# Altium PCB PCB1.PcbDoc (part 3 of 3)
Units mil, origin at the board's own origin, x right, y up, seen from the top; angles counter-clockwise.
Board outline 3937.01 x 3937.01 mil, 4 copper layers (L1, L2, L3, L4), stack 61.831 mil thick; 104 components, 183 nets, 709 pads, 345 vias.
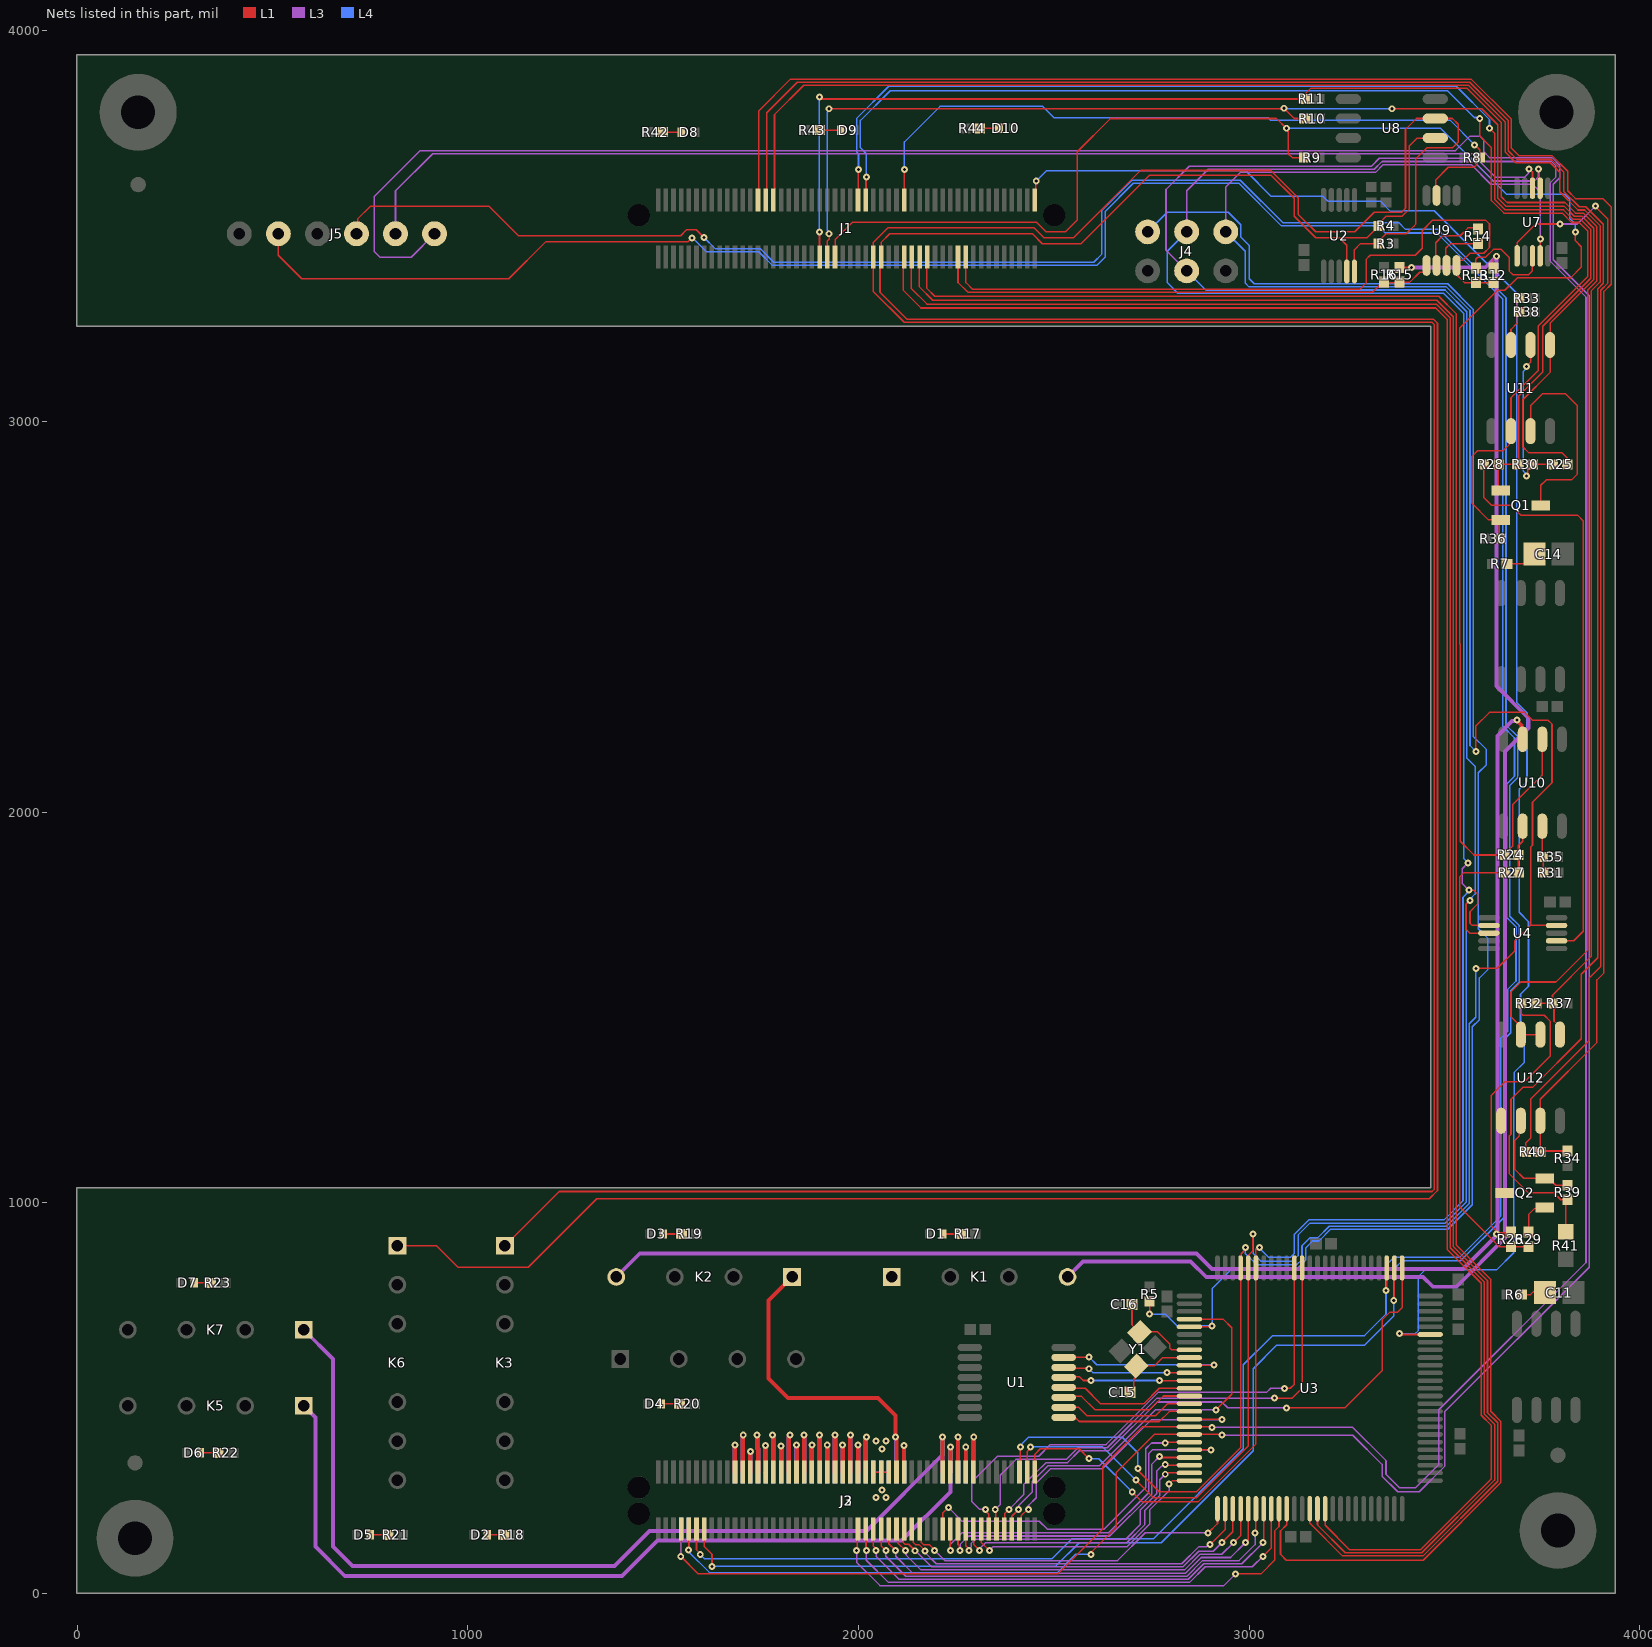
[diagram p5: the nets of this part, all layers, seen from the top]

## Via types
v1: diameter 17.72, hole 7.87, L1 to L4, 345 vias

## Nets (pads, with @x,y where several pads share a name; then routed paths per layer and width w, separated by ;. In a path a pad name is that pad's centre, name@x,y a point inside that pad or via, vN(x,y) a via of type N, cw(c..) or ccw(c..) an arc to the next point about the centre after c; other vN are vias at no path point) (continued)
GPIO43: J1.99 U3.95 | length 4467.8
  L1 w4: J1.99@2451.54,3566.42 2453.27,3568.15 2453.27,3613.27 v1(2455,3615) ; v1(3385,665) 3390,665 3392.2,662.8 U3.95@3463.07,662.8
  L4 w4: v1(2455,3615) 2481,3641 2990.81,3641 3055.96,3575.86 3188.89,3575.86 3201.75,3563 3335.69,3563 3361.69,3537 3391.57,3537 3393.36,3538.79 3473.58,3538.79 3684.84,3327.53 3684.84,2280.16 3711,2254 3711,2078.2 3691,2058.2 3691,1743.24 3714.86,1719.38 3714.86,1554.04 3694.28,1533.46 3694.28,1437.03 3704,1427.31 3704,1359 3678,1333 3678,1272.25 3677.14,1271.39 3677.14,872.14 3633,828 3450,828 3433,811 3433,673 3425,665 v1(3385,665)
GPIO44: J1.66 U3.65 | length 5092.2
  L1 w4: J1.66@2116.89,3420.75 2115,3418.86 2115,3335 2160,3290 3477.37,3290 3506.35,3261.03 3506.35,881.17 3593.86,793.66 3593.86,456.14 3620,430 3620,293.69 3438.31,112 3256.69,112 3194.37,174.32 U3.65@3194.37,216.93
GPIO45: J1.68 U3.64 | length 5114.1
  L1 w4: J1.68@2135,3420.75 2135,3340 2175,3300 3478.69,3300 3514.35,3264.34 3514.35,884.48 3601.86,796.97 3601.86,459.46 3628,433.31 3628,290.37 3441.63,104 3246,104 3174.69,175.31 U3.64@3174.69,216.93
GPIO46: J1.70 U3.63 | length 5134.7
  L1 w4: J1.70@2155,3420.75 2155,3345 2190,3310 3480,3310 3522.35,3267.65 3522.35,887.8 3609.86,800.28 3609.86,462.77 3636,436.63 3636,287.06 3444.94,96 3239,96 3155,180 U3.63@3155,216.93
GPIO47: J1.72 U3.60 | length 5277.2
  L1 w4: J1.72@2175,3420.75 2175,3340 2195,3320 3485,3320 3530.35,3274.65 3530.35,891.11 3617.86,803.6 3617.86,466.08 3644,439.94 3644,283.75 3445.25,85 3095,85 3080,100 3080,160 3095.94,175.94 U3.60@3095.94,216.93
GPIO48: J2.54 U3.59 | length 1344.7
  L1 w4: v1(1995,110) 1996.89,111.89 1996.89,162.95 J2.54@1998.78,164.84 ; v1(2965,50) 3030,50 3065,85 3065,160 3076.26,171.26 U3.59@3076.26,216.93
  L3 w4: v1(1995,110) 1995,80 2054.86,20.14 2935.14,20.14 v1(2965,50)
GPIO49: J2.56 U3.58 | length 1277.6
  L1 w4: J2.56@2018.46,164.84 2019.23,164.07 2019.23,110.77 v1(2020,110) ; v1(3035,95) 3056.57,116.57 U3.58@3056.57,216.93
  L3 w4: v1(2020,110) 2020,85 2076.86,28.14 2847.34,28.14 2887.2,68 3008,68 v1(3035,95)
GPIO50: J2.58 U3.57 | length 1213.6
  L1 w4: J2.58@2038.15,164.84 2038.15,120.56 2045,113.71 v1(2045,110) ; v1(3035,130) 3036.89,131.89 U3.57@3036.89,216.93
  L3 w4: v1(2045,110) 2045,95 2103.86,36.14 2844.02,36.14 2883.88,76 2981,76 v1(3035,130)
GPIO51: J2.60 U3.56 | length 1167.3
  L1 w4: J2.60@2057.83,164.84 2057.83,122.17 v1(2070,110) ; v1(3015,155) 3017.2,157.2 U3.56@3017.2,216.93
  L3 w4: v1(2070,110) 2070,95 2120.86,44.14 2840.71,44.14 2880.57,84 2974,84 3015,125 v1(3015,155)
GPIO52: J2.62 U3.55 | length 1112.1
  L1 w4: J2.62@2077.52,164.84 2077.52,127.48 v1(2095,110) ; v1(2990,130) 2997.52,137.52 U3.55@2997.52,216.93
  L3 w4: v1(2095,110) 2095,95 2137.86,52.14 2837.4,52.14 2877.25,92 2952,92 v1(2990,130)
GPIO53: J2.64 U3.54 | length 1054
  L1 w4: J2.64@2097.2,164.84 2100,162.05 2100,130 v1(2120,110) ; v1(2960,130) 2977.83,147.83 U3.54@2977.83,216.93
  L3 w4: v1(2120,110) 2121.51,108.49 2121.51,98.49 2159.86,60.14 2834.08,60.14 2873.94,100 2930,100 v1(2960,130)
GPIO54: J2.66 U3.53 | length 1030.5
  L1 w4: J2.66@2120.8,137.31 2116.89,141.22 J2.66@2116.89,164.84 2115,162.95 2115,130 2119.14,125.86 2128.26,125.86 v1(2144.95,109.17) v1@2144.95,110.05 ; v1(2930,130) 2958.15,158.15 U3.53@2958.15,216.93
  L3 w4: v1(2144.95,109.17) 2145.83,109.17 2186.86,68.14 2830.77,68.14 2870.63,108 2908,108 v1(2930,130)
GPIO55: J2.68 U3.52 | length 949.1
  L1 w4: J2.68@2136.57,164.84 2140.48,160.94 2140.48,130.38 2145.86,125 2155,125 2170,110 v1(2170,109.14) ; v1(2900,125) 2938.46,163.46 U3.52@2938.46,216.93
  L3 w4: v1(2170,109.14) 2170,105 2198.86,76.14 2827.46,76.14 2871.31,120 2891.29,120 2896.29,125 v1(2900,125)
GPIO56: J2.70 U3.51 | length 891.3
  L1 w4: J2.70@2156.26,164.84 2160.17,160.94 2160.17,131.15 2166.31,125 2181.01,125 2195,111.01 v1(2195,110) ; v1(2895,155) 2918.78,178.78 U3.51@2918.78,216.93
  L3 w4: v1(2195,110) 2220.86,84.14 2663.08,84.14 2733.94,155 v1(2895,155)
GPIO57: J2.76 U3.45 | length 852
  L1 w4: J2.76@2215.32,164.84 2215.16,165 2215.16,205.16 v1(2230,220) ; v1(2785,385) 2787.2,387.2 U3.45@2846.93,387.2
  L3 w4: v1(2230,220) 2265,185 2462.85,185 2484.02,163.83 2627.62,163.83 2735,271.2 2735,370 2750,385 v1(2785,385)
GPIO58: J2.78 U3.46 | length 952
  L1 w4: v1(2235,110) J2.78@2235,164.84 ; U3.46@2846.93,367.52 v1(2902.52,367.52)
  L3 w4: v1(2235,110) 2235,125 2265,155 2640,155 2743,258 2743,358 2752.52,367.52 v1(2902.52,367.52)
GPIO59: J2.80 U3.47 | length 797.8
  L1 w4: J2.80@2254.69,164.84 2254.69,125.31 2257.38,122.62 2257.38,112.62 v1(2260,110) ; v1(2770,350) 2772.17,347.83 U3.47@2846.93,347.83
  L3 w4: v1(2260,110) 2260,125 2282,147 2643.31,147 2751,254.69 2751,331 v1(2770,350)
GPIO60: J2.82 U3.48 | length 777.5
  L1 w4: J2.82@2274.37,164.84 2274.37,122.06 2282.72,113.71 v1(2282.72,110) ; v1(2785,330) 2786.85,328.15 U3.48@2846.93,328.15
  L3 w4: v1(2282.72,110) 2282.72,112.92 2289,119.2 2289,129 2299,139 2684,139 2721.31,176.31 2721.31,213.69 2762.83,255.2 2762.83,312.83 2775.99,325.99 2777.28,325.99 2781.29,330 v1(2785,330)
GPIO61: J2.84 U3.49 | length 728.2
  L1 w4: J2.84@2294.06,164.84 2295,163.9 2295,125 v1(2310,110) ; v1(2785,305) 2788.46,308.46 U3.49@2846.93,308.46
  L3 w4: v1(2310,110) 2310,113.71 2314.01,117.72 2314.01,119.01 2325,130 2686.31,130 2733.03,176.72 2733.03,213.03 2770.83,250.83 2770.83,290.83 v1(2785,305)
GPIO62: J2.86 U3.50 | length 687.1
  L1 w4: J2.86@2313.74,164.84 2313.74,131.26 v1(2335,110) ; v1(2795,280.13) 2795.13,280.13 2803.78,288.78 U3.50@2846.93,288.78
  L3 w4: v1(2335,110) 2345,120 2687.63,120 2745,177.37 2745,213.69 2795,263.69 v1(2795,280.13) 2795,280.86 v1@2799.14,285
GPIO63: J2.88 U3.15 | length 1373.8
  L1 w4: v1(2325,215) 2325,211.29 2333.43,202.86 J2.88@2333.43,164.84 ; v1(3090,525) 3105,525 3115.63,535.63 U3.15@3115.63,833.07
  L3 w4: v1(2325,215) 2310,215 2290,235 2290,285 2356,351 2461,351 2491,381 2633.37,381 2767.7,515.33 3045.33,515.33 3055,525 v1(3090,525)
GPIO64: J2.90 U3.14 | length 1317
  L1 w4: v1(2350,215) 2351.56,213.44 2351.56,166.4 J2.90@2353.11,164.84 ; v1(3065,500) 3110,500 3135.32,525.31 U3.14@3135.32,833.07
  L3 w4: v1(2350,215) 2362.67,227.67 2362.67,302.67 2403,343 2531.69,343 2561.69,373 2636.69,373 2763.69,500 v1(3065,500)
GPIO65: J2.92 U3.1 | length 1480.6
  L1 w4: J2.92@2372.8,164.84 2373.9,165.94 2373.9,203.9 v1(2385,215) ; v1(3095,475) 3245,475 3340,570 3340,700 3360,720 3380,720 3391.22,731.22 U3.1@3391.22,833.07
  L3 w4: v1(2385,215) 2422.5,252.5 2422.5,278.71 2480.44,335 2535,335 2565,365 2640,365 2765,490 2930,490 2945,475 v1(3095,475)
GPIO66: J2.94 U3.29 | length 1033.6
  L1 w4: J2.94@2392.48,164.84 2392.48,197.48 v1(2410,215) ; U3.29@2846.93,702.17 2932.83,702.17 2955,680 2955,510 v1(2915,470)
  L3 w4: v1(2410,215) 2410,225 2445,260 2445,287.11 2484.89,327 2617,327 2760,470 v1(2915,470)
GPIO67: J2.96 U3.42 | length 762.8
  L1 w4: J2.96@2412.17,164.84 2416.07,168.75 2416.07,198.64 2432.43,215 v1(2435,215) ; U3.42@2846.93,446.26 2928.74,446.26 v1(2930,445)
  L3 w4: v1(2435,215) 2435,225 2455,245 2455,282.51 2491.49,319 2624,319 2750,445 v1(2930,445)
H: J2.21 J3.22 | length 139
  L1 w11.55: v1(1683.77,380) 1683.82,379.95 J2.21@1683.82,310.51
  L4 w11.55: J3.22@1683.82,310.51 v1(1683.77,380)
I: J2.23 J3.24 | length 190.2
  L1 w11.55: J2.23@1703.5,310.51 1703.5,403.5 v1(1705,405)
  L4 w11.55: J3.24@1703.5,310.51 1703.5,401.84 1705,403.33 v1(1705,405)
J: J2.25 J3.26 | length 105.3
  L1 w11.55: J2.25@1723.19,310.51 v1@1723.16,363.13
  L4 w11.55: J3.26@1723.19,310.51 v1@1723.16,363.13
  other v1: 1723.14,363.16
K: J2.27 J3.28 | length 191.4
  L1 w11.55: v1(1740,405) 1740.73,404.27 1740.73,371.87 1742.87,369.73 J2.27@1742.87,310.51
  L4 w11.55: v1(1740,405) 1740.73,404.27 1740.73,371.87 1742.87,369.73 J3.28@1742.87,310.51
L: J2.29 J3.30 | length 137.7
  L1 w11.55: v1(1761.45,378.92) 1761.45,311.62 J2.29@1762.56,310.51
  L4 w11.55: v1(1761.45,378.92) 1761.45,311.62 J3.30@1762.56,310.51
M: J2.31 J3.32 | length 190.8
  L1 w11.55: v1(1780,405) 1782.24,402.76 J2.31@1782.24,310.51
  L4 w11.55: v1(1780,405) 1780,403.33 1782.24,401.09 J3.32@1782.24,310.51
MISO: J2.95 J4.1 U3.22 U4.9 U7.9 | length 6696.8
  L1 w4: J2.95@2412.17,310.51 2413.58,311.93 2413.58,373.58 v1(2415,375) ; v1(2715,320) 2715,315 2770,260 2865,260 2977.83,372.83 U3.22@2977.83,833.07 2979.33,834.57 2979.33,869.33 2990,880 v1(2990,885) ; v1(3580,1600) 3635,1600 3680,1645 3680,1670 3720,1710 ; v1(3580,2155) 3580,2220 3615,2255 3705,2255 3725,2235 3765,2235 3775,2225 3775,2075 3725,2025 3725,1915 3720,1910 3720,1710 ; U7.9@3744.69,3419.45 3744.69,3464.69 3745,3465 v1(3745,3466.14) ; U4.9@3790.55,1709.69 3790.24,1710 3720,1710
  L3 w4: J4.1@2940,3485 2940,3600 2977,3637 3323.31,3637 3343.31,3657 3568,3657 3618,3607 3725,3607 3745,3587 v1(3745,3466.14)
  L4 w4: v1(2415,375) 2415,378.71 2419.01,382.72 2419.01,384.01 2435,400 2675,400 2715,360 v1(2715,320) ; J4.1@2950,3475 2990,3435 2990,3353.69 2999.69,3344 3504.69,3344 3565,3283.69 3565,2170 v1(3580,2155) ; v1(2990,885) 2990,870 3018.34,841.66 3121.66,841.66 3135,855 3135,890 3155,910 3175,910 3205,940 3505,940 3563.14,998.14 3563.14,1458.14 3580,1475 v1(3580,1600)
MOSI: J2.97 J4.4 U3.21 U4.3 U7.3 | length 6440.6
  L1 w4: J2.97@2431.85,310.51 2431.85,363.14 2440,371.29 v1(2440,375) ; v1(2710,290) 2755,245 2865,245 2997.52,377.52 U3.21@2997.52,833.07 2997.52,865.09 3009.14,876.71 3009.14,919.14 v1(3010,920) ; v1(3565,1773.99) 3555,1763.99 3555,1700 3565,1690 U4.3@3609.45,1690 ; v1(3715.57,3646.14) 3716.91,3646.14 3725,3638.05 U7.3@3725,3600.55
  L3 w4: J4.4@2830,3390 2830,3395 2787,3438 2787,3593.31 2846.69,3653 3313,3653 3333,3673 3582,3673 3630,3625 3705,3625 3714.28,3634.28 3714.28,3644.85 v1(3715.57,3646.14)
  L4 w4: v1(2440,375) 2625,375 v1(2710,290) ; J4.4@2840,3385 2889,3336 3501.37,3336 3557,3280.37 3557,2166.69 3557,2138.36 3578,2117.36 3578,1790 3565,1777 v1(3565,1773.99) 3565,1773.66 3555.14,1763.8 3555.14,1001.46 3501.69,948 3155.57,948 3125,917.43 3125,865 3110,850 3030,850 3010,870 v1(3010,920)
N: J2.33 J3.34 | length 132.9
  L1 w11.55: J2.33@1801.93,310.51 v1(1801.88,376.93)
  L4 w11.55: J3.34@1801.93,310.51 v1(1801.88,376.93)
NET1: J1.31 R32.1 R37.2 U12.5 | length 4757.2
  L1 w4: J1.31@1785,3566.42 1785,3785 1860,3860 3561.31,3860 3655,3766.31 3655,3689.34 3682.34,3662 3770.37,3662 3795,3637.37 3795,3587.37 3841.51,3540.86 3858.14,3540.86 3898,3501 3898,3356.43 3875,3333.43 3875,3155 3875,1630 3776.3,1531.3 R37.2@3776.3,1510 ; R32.1@3733.7,1510 R37.2@3776.3,1510 ; U12.5@3795,1430.24 3795,1450 3780,1465 3780,1506.3 R37.2@3776.3,1510
NET2: J1.55 Q1.2 R36.2 U11.6 | length 3357.3
  L1 w4: J1.55@2018.46,3566.42 2019.23,3567.19 2019.23,3624.23 v1(2020,3625) ; v1@3590,3774.95 3590,3730 3620,3700 3620,3565 3652,3533 3801,3533 3825.14,3508.86 3844.88,3508.86 3866,3487.74 3866,3369.69 3740,3243.69 3740,3130 3670,3060 U11.6@3670,2974.76 3665.87,2970.63 3665.87,2940.87 3657.93,2932.93 3650,2925 3585,2925 3570,2910 3570,2790 3612.4,2747.6 Q1.2@3643.82,2747.6 3640,2743.78 3640,2703.7 R36.2@3643.7,2700
  L4 w4: v1(2020,3625) 2020,3685 2005,3700 2005,3770 2081,3846 3507.29,3846 3575.66,3777.62 3587.38,3777.62 3587.38,3777.57 v1(3589.97,3774.97)
NET3: J1.53 Q1.1 R28.1 R30.1 | length 3186.9
  L1 w4: J1.53@1998.78,3566.42 1999.39,3567.03 1999.39,3644.39 v1(2000,3645) ; v1(3615,3750) 3628,3737 3628,3568.31 3655.31,3541 3804.31,3541 3828.46,3516.86 3848.2,3516.86 3874,3491.05 3874,3366.37 3751.2,3243.58 3751.2,3126.2 3690,3065 3690,2892.4 R30.1@3687.6,2890 R28.1@3637.4,2890 3637.4,2828.82 Q1.1@3643.82,2822.4
  L4 w4: v1(2000,3645) 2000,3685 1995,3690 1995,3775 2077.71,3857.71 3529.67,3857.71 3615,3772.37 v1(3615,3750)
NET4: J1.29 R39.1 R41.2 | length 5427.4
  L1 w4: J1.29@1765,3566.42 1765,3790 1843,3868 3564.63,3868 3663,3769.63 3663,3692.66 3685.66,3670 3773.69,3670 3805.28,3638.4 3805.28,3588.4 3844.83,3548.86 3861.45,3548.86 3906,3504.31 3906,3353.12 3891.8,3338.92 3891.8,1626.8 3850,1585 3850,1420 3725,1295 3700,1295 3670,1265 3670,1175 3665,1170 3665,1075 3715,1025 3780,1025 3797.4,1007.6 R39.1@3815,1007.6 3810,1002.6 R41.2@3810,925.87
NET5: J1.27 R34.1 R40.2 U12.3 | length 5216.7
  L1 w4: J1.27@1745,3566.42 1745,3795 1826,3876 3567.94,3876 3671,3772.94 3671,3699 3690,3680 3775,3680 3815,3640 3815,3590 3835,3570 3905,3570 3926.6,3548.4 3926.6,3351.09 3907.8,3332.29 3907.8,1587.8 3890,1570 3890,1410 3745,1265 U12.3@3745,1209.76 R40.2@3745,1130 3747.4,1132.4 R34.1@3815,1132.4
NET6: J1.82 R12.1 R13.2 U9.4 | length 1832.8
  L1 w4: J1.82@2274.37,3420.75 2275,3420.12 2275,3355 2292,3338 3283.31,3338 3299.14,3353.83 3299.14,3414.14 3310,3425 3425,3425 3443,3443 3443,3488 3470,3515 3605,3515 3615,3505 3615,3445 3600,3430 3565,3430 3547.68,3412.69 3538.75,3412.69 3530.59,3404.53 U9.4@3530.59,3395 ; U9.4@3528.39,3381.5 3528.39,3377.52 3550.91,3355 R13.2@3580,3355 R12.1@3625,3355
NET7: J1.80 R15.1 R16.2 U9.1 | length 1294.8
  L1 w4: J1.80@2254.69,3420.75 2254.69,3355.31 2280,3330 3315,3330 3328.22,3343.22 3329.2,3343.22 3340,3354.02 3340,3355 3383.7,3355 R15.1@3385,3356.3 3411.3,3356.3 3436.5,3381.5 U9.1@3451.61,3381.5
NetC11_2: C11.2 R6.1 | length 39.8
  L1 w4: R6.1@3694.35,765 3720,765 C11.2@3730,775
NetC14_2: C14.2 R7.1 | length 80.4
  L1 w4: R7.1@3660,2635 3705,2635 C14.2@3730,2660
NetC15_2: C15.2 U3.34 Y1.1 | length 218.6
  L1 w4: C15.2@2695,515 2705,525 2705,549.49 2710.82,555.32 Y1.1@2710.82,581.85 2712.22,583.24 2758.24,583.24 2778.74,603.74 U3.34@2846.93,603.74
NetC16_2: C16.2 U3.33 Y1.3 | length 233.5
  L1 w4: C16.2@2700,740 2700,687.33 Y1.3@2719.18,668.15 2720.57,669.54 2756.45,669.54 2756.91,670 2765,670 2796.17,638.83 2796.17,628.83 2800.01,624.99 2801.57,623.43 U3.33@2846.93,623.43
NetD1_2: D1.2 R17.2 | length 45.9
  L1 w4: D1.2@2215.43,920 R17.2@2261.3,920
NetD2_2: D2.2 R18.2 | length 42.6
  L1 w4: D2.2@1050,150 R18.2@1092.6,150
NetD3_2: D3.2 R19.2 | length 47.2
  L1 w4: D3.2@1500.43,920 R19.2@1547.6,920
NetD4_2: D4.2 R20.2 | length 47.6
  L1 w4: D4.2@1495,485 R20.2@1542.6,485
NetD5_2: D5.2 R21.2 | length 46.3
  L1 w4: D5.2@750,150 R21.2@796.3,150
NetD6_2: D6.2 R22.2 | length 46.3
  L1 w4: D6.2@315,360 R22.2@361.3,360
NetD7_2: D7.2 R23.2 | length 41.3
  L1 w4: D7.2@300,795 R23.2@341.3,795
NetD8_2: D8.2 R42.2 | length 48.5
  L1 w4: R42.2@1498.7,3740 D8.2@1547.18,3740
NetD9_2: D9.2 R43.2 | length 54.6
  L1 w4: R43.2@1900,3745 D9.2@1954.57,3745
NetD10_2: D10.2 R44.2 | length 49.6
  L1 w4: R44.2@2310,3750 D10.2@2359.57,3750
NetQ1_3: Q1.3 U11.7 | length 542
  L1 w4: U11.7@3720,2974.76 3720,3040 3750,3070 3810,3070 3840,3040 3840,2865 3825,2850 3760,2850 3746.18,2836.18 Q1.3@3746.18,2785
NetQ2_1: Q2.1 R29.1 | length 93.5
  L1 w4: R29.1@3715,925 3715,970 3730,985 3753.58,985 Q2.1@3756.18,987.6
NetQ2_2: Q2.2 R39.2 U12.2 | length 282.5
  L1 w4: U12.2@3695,1209.76 3690.87,1205.63 3690.87,1170.87 3680,1160 3680,1085 3702.6,1062.4 Q2.2@3756.18,1062.4 3767.01,1062.4 3784.41,1045 R39.2@3815,1045
NetQ2_3: Q2.3 U12.1 | length 188.4
  L1 w4: U12.1@3645,1209.76 3645,1033.82 Q2.3@3653.82,1025
NetR14_1: R14.1 U9.2 | length 200.2
  L1 w4: U9.2@3477.2,3381.5 3477.2,3457.2 3495,3475 3540,3475 3560,3495 3582.4,3495 R14.1@3585,3492.4
NetR14_2: R14.2 U9.3 | length 148.6
  L1 w4: U9.3@3502.8,3381.5 3502.8,3442.8 3515,3455 R14.2@3585,3455
NetR24_1: R24.1 R27.2 U10.2 | length 126.6
  L1 w4: R27.2@3687.4,1842.4 3688.7,1843.7 R24.1@3688.7,1890 3688.7,1913.7 3700,1925 U10.2@3700,1963.78
NetR25_1: R25.1 R30.2 U11.2 | length 434.8
  L1 w4: v1(3710,2860) 3713.22,2863.22 3713.22,2879.2 3724.02,2890 R30.2@3725,2890 R25.1@3776.3,2890 ; v1(3710,3140) 3710,3141.01 3720,3151.01 U11.2@3720,3195.24
  L4 w4: v1(3710,2860) 3710,2863.71 3701.14,2872.57 3701.14,3127.43 3710,3136.29 v1(3710,3140)
NetR26_1: R26.1 R27.1 R29.2 | length 1181.6
  L1 w4: R27.1@3652.6,1845 3550,1845 3538.35,1833.35 3538.35,989.85 3640.6,887.6 R26.1@3670,887.6 R29.2@3715,887.6
NetR31_2: R31.2 R35.2 U10.3 | length 119.9
  L1 w4: U10.3@3750,1963.78 3750,1891.3 3751.3,1890 3752.6,1888.7 R31.2@3752.6,1845
NetR33_2: R33.2 R38.2 U11.3 | length 116.5
  L1 w4: U11.3@3670,3195.24 3670,3235 3686.3,3251.3 R33.2@3686.3,3305
O: J2.35 J3.36 | length 192
  L1 w11.55: J2.35@1821.61,310.51 1821.51,310.62 1821.51,401.51 v1(1825,405)
  L4 w11.55: J3.36@1821.61,310.51 1821.51,310.62 1821.51,399.84 1825,403.33 v1(1825,405)
P: J2.37 J3.38 | length 130.3
  L1 w11.55: J2.37@1841.3,310.51 v1@1841.3,371.3
  L4 w11.55: v1(1841.14,380) 1841.22,379.92 1841.22,310.59 J3.38@1841.3,310.51
P0W: R28.2 U4.7 | length 1489.5
  L1 w4: R28.2@3600,2890 3600,2805 3620,2785 3670,2785 3695,2760 3840,2760 3855,2745 3855,1695 3830.32,1670.31 U4.7@3790.55,1670.31
P1W: R40.1 U7.6 | length 2798.8
  L1 w4: U7.6@3685.63,3419.45 3685.63,3457.03 3733.6,3505 v1(3795,3505) ; R40.1@3707.6,1130 3707.6,1152.6 3720,1165 3720,1265 3870,1415 3870,1575 3899.8,1604.8 3899.8,3335.6 3918,3353.8 3918,3517 3886.14,3548.86 v1(3886.14,3551.29)
  L3 w4: v1(3795,3505) 3839.86,3505 v1(3886.14,3551.29)
P2W: R13.1 U7.8 | length 264
  L1 w4: R13.1@3580,3392.4 3580,3415 3585,3420 3605,3420 3625,3440 3645,3440 3665,3420 3665,3385 3675,3375 3715,3375 3724.6,3384.6 3724.6,3419.05 U7.8@3725,3419.45
Q: J2.39 J3.40 | length 189.8
  L1 w11.55: v1(1860,405) 1860.98,404.02 J2.39@1860.98,310.51
  L4 w11.55: v1(1860,405) 1860.85,404.15 1860.85,310.64 J3.40@1860.98,310.51
R: J2.41 J3.42 | length 139
  L1 w11.55: J2.41@1880.67,310.51 v1(1880.67,380)
  L4 w11.55: J3.42@1880.67,310.51 v1(1880.67,380)
RASP_SCL: J1.58 K3.1 R3.1 U2.10 U8.7 | length 8747.4
  L1 w4: K3.1@1095,890 1233.74,1028.74 3468.12,1028.74 3473.91,1034.53 3473.91,3247.43 3468.12,3253.22 2116.78,3253.22 2038.15,3331.85 J1.58@2038.15,3420.75 2038.15,3458.15 2075,3495 2450,3495 2475,3470 2550,3470 2722,3642 3055.03,3642 3125,3572.03 3125,3530 3170,3485 3270,3485 3320,3535 3390,3535 3400,3545 3400,3746.89 3428.11,3775 U8.7@3476.22,3775 3520,3775 3535,3760 3535,3715 3520,3700 3454.95,3700 3425.86,3670.9 3425.86,3503.81 3422,3499.95 3402.05,3480 3350,3480 R3.1@3335,3465 ; U2.10@3269.37,3383.46 3269.37,3439.37 3285,3455 R3.1@3331.3,3455
RASP_SDA: J1.60 K6.1 R4.1 U2.9 U8.6 | length 8476.4
  L1 w4: K6.1@820,890 920,890 975,835 1155,835 1330,1010 3460.69,1010 3481.91,1031.21 3481.91,3235 3481.91,3250.74 3471.44,3261.22 2123.78,3261.22 2055,3330 2055,3417.91 J1.60@2057.83,3420.75 2057.83,3457.83 2080,3480 2445,3480 2470.28,3454.72 2569.72,3454.72 2745,3630 3055.72,3630 3115,3570.72 3115,3525 3170,3470 3230,3470 ; U2.9@3249.69,3383.46 3249.69,3450.31 3230,3470 ; U8.6@3476.22,3725 3430,3725 3410,3705 3410,3543.69 3391.31,3525 3350,3525 3341.45,3516.45 3341.45,3510.15 R4.1@3331.3,3500 3301.3,3470 3230,3470
RELAY1: U1.7 U3.35 | length 456.7
  L1 w4: U1.7@2525.08,605 v1(2590,605) ; U3.35@2846.93,584.06 2909.06,584.06 v1(2910,585)
  L4 w4: v1(2590,605) 2610,585 v1(2910,585)
RELAY2: U1.5 U3.37 | length 311.2
  L1 w4: U1.5@2540,555 2565,555 2575,545 v1(2595,545) ; v1(2770,545) 2770.31,544.69 U3.37@2846.93,544.69
  L4 w4: v1(2595,545) v1(2770,545)
RELAY3: U1.2 U3.40 | length 343.2
  L1 w4: U1.2@2525.08,476.02 2563.98,476.02 2585,455 2760,455 2790.63,485.63 U3.40@2846.93,485.63
RELAY4: U1.1 U3.41 | length 336.9
  L1 w4: U1.1@2525.08,450.43 2527.7,447.81 2557.19,447.81 2565,440 2770,440 2795.94,465.94 U3.41@2846.93,465.94
RELAY5: U1.4 U3.38 | length 355
  L1 w4: U1.4@2525.08,525 2580,525 2620,485 2730,485 2770,525 U3.38@2846.93,525
RELAY6: U1.3 U3.39 | length 330
  L1 w4: U1.3@2545.76,504.24 2570.76,504.24 2605,470 2745,470 2780.32,505.31 U3.39@2846.93,505.31
RELAY7: U1.6 U3.36 | length 327.7
  L1 w4: U1.6@2525.08,575 2540,575 2541.69,576.69 2588.31,576.69 v1(2590,575) ; v1(2790,565) 2790.63,564.37 U3.36@2846.93,564.37
  L4 w4: v1(2590,575) 2600,565 v1(2790,565)
RESET: J4.5 R5.1 U3.30 | length 4498.7
  L1 w4: v1(2745,715) R5.1@2745,747.6 ; U3.30@2846.93,682.48 2902.48,682.48 v1(2905,685)
  L4 w4: J4.5@2740,3485 2790,3535 2946.06,3535 2978.03,3503.03 2978.03,3471.97 3000,3450 3000,3365 3013,3352 3508,3352 3573,3287 3573,2193.88 3607,2159.88 3607,2121.28 3586,2100.28 3586,1701.16 3610.86,1676.3 3610.86,1597.12 3589.14,1575.4 3589.14,1468.14 3571.14,1450.14 3571.14,994.83 3508.31,932 3208.31,932 3178.31,902 3162,902 3145,885 3145,853.69 3124.97,833.66 2958.66,833.66 2905,780 v1(2905,685) 2815,685 2785,715 v1(2745,715)
S: J2.43 J3.44 | length 189.3
  L1 w11.55: v1(1900,405) 1900.35,404.65 J2.43@1900.35,310.51
  L4 w11.55: v1(1900,405) 1900.3,404.7 1900.3,310.56 J3.44@1900.35,310.51
SCK: J2.99 J4.3 U3.20 U4.2 U7.2 | length 6382.3
  L1 w4: J2.99@2451.54,310.51 2451.54,356.54 2465,370 2565,370 v1(2590,345) ; v1(2700.69,259.31) 2725,235 2870,235 3017.2,382.2 U3.20@3017.2,833.07 3017.2,882.66 ; v1(3562.14,1800) 3575,1800 3584.54,1790.46 3584.54,1764.54 3565,1745 3565,1715 3570.31,1709.69 U4.2@3609.45,1709.69 ; v1(3740,3645.73) 3742.44,3643.3 3742.44,3602.8 U7.2@3744.69,3600.55
  L3 w4: J4.3@2840,3485 2840,3590 2895,3645 3320,3645 3340,3665 3575,3665 3625,3615 3730,3615 3740,3625 v1(3740,3645.73) ; v1(3560,1870) 3545,1855 3545,1817.14 v1(3562.14,1800)
  L4 w4: v1(2590,345) 2615,345 v1(2700.69,259.31) ; J4.3@2840,3485 2790,3435 2790,3355 2817,3328 3497,3328 3549,3276 3549,1881 v1@3562.78,1867.22 ; v1(3025.86,885) 3025.86,884.14 3050,860 3105,860 3115,870 3115,918.74 3152.26,956 3498.37,956 3547.14,1004.77 3547.14,1782.14 3562.14,1797.14 v1(3562.14,1800)
SCL: J2.8 J3.7 J5.5 U3.43 | length 9115.6
  L1 w4: J2.8@1546.02,164.84 1546.02,96.02 v1(1545,95) 1590,50 2510,50 2625,165 2625,325 2726.57,426.57 U3.43@2846.93,426.57 2903.43,426.57 v1(2905,425)
  L3 w4: J5.5@815,3480 815,3590 910,3685 3585,3685 3605,3665 3773.69,3665 3785,3653.69 3785,3625 3770,3610 3770,3410 3862,3318 3862,847 3485,470 3485,330 3425,270 3385,270 3350,305 3350,340 3265,425 v1(2905,425)
  L4 w4: v1(1545,95) 1545.51,95.51 1545.51,164.33 J3.7@1546.02,164.84
SDA: J2.10 J3.9 J5.6 U3.44 | length 9408.9
  L1 w4: v1(1565,110.86) 1565,112.06 1565.71,112.77 J2.10@1565.71,164.84 ; v1(2595,100) 2595,105 2660,170 2660,310 2756.89,406.89 U3.44@2846.93,406.89 2928.11,406.89 v1(2930,405)
  L3 w4: J5.6@915,3480 855,3420 775,3420 760,3435 760,3575 878,3693 3528,3693 3565,3730 3590,3730 3600,3720 3600,3690 3615,3675 3775,3675 3795,3655 3795,3623.69 3778,3606.69 3778,3413.31 3870,3321.31 3870,835 3500,465 3500,325 3435,260 3380,260 3340,300 3340,330 3265,405 v1(2930,405)
  L4 w4: J3.9@1565.71,164.84 1565.35,164.49 1565.35,111.21 v1(1565,110.86) 1565,106.71 1618.43,53.28 2509.6,53.28 2556.31,100 v1(2595,100)
T: J2.45 J3.46 | length 139
  L1 w11.55: v1(1920,380) 1920,310.55 J2.45@1920.04,310.51
  L4 w11.55: J3.46@1920.04,310.51 v1(1920,380)
U: J2.47 J3.48 | length 189.2
  L1 w11.55: J2.47@1939.72,310.51 1939.72,404.72 v1(1940,405)
  L4 w11.55: J3.48@1939.72,310.51 1939.83,310.62 1939.83,404.83 v1(1940,405)
V5V: K1.4 R12.2 R15.2 | length 4079.4
  L1 w4: R15.2@3385,3393.7 3414.56,3393.7 v1(3415,3394.14) ; R12.2@3625,3392.4 3625,3415 v1(3632.5,3422.5)
  L3 w10: K1.4@2535,810 2575,850 2850,850 2890,810 3445,810 3470,785 3530,785 3655,910 3655,2155 3715,2215 3715,2240 3632.5,2322.5 v1(3632.5,3422.5) 3604.14,3394.14 v1(3415,3394.14)
VAD: K2.4 R26.2 R32.2 U10.7 | length 4534.3
  L1 w4: v1@3637.05,920 3637.05,922.95 3620,940 3620,1275 3655,1310 3705,1310 3770,1375 3770,1465 3755,1480 3700,1480 3696.3,1483.7 R32.2@3696.3,1510 ; R26.2@3665,920 R26.2@3670,925 ; U10.7@3700,2186.22 U10.7@3700,2205.91
  L1 w10: v1(3633.14,920) 3637.05,920 R26.2@3665,920 ; v1(3685,2235) 3685,2234.09 3697.02,2222.08 3697.02,2189.2 U10.7@3700,2186.22
  L3 w4: v1@3682.5,2232.5 v1(3685,2235)
  L3 w10: K2.4@1380,810 1440,870 2865,870 2905,830 3547.05,830 3629.28,912.23 3629.28,914.05 3633.14,917.91 v1(3633.14,920) ; v1@3635,926.23 3635,2195 3672.5,2232.5 v1@3682.5,2232.5
VCTB_RX: J2.14 J5.4 U3.2 | length 8518.9
  L1 w4: J5.4@715,3480 717.89,3482.89 717.89,3517.89 750,3550 1055,3550 1130,3475 1545,3475 1560,3490 1585,3490 v1(1605,3470) ; J2.14@1605.08,164.84 1605.08,119.92 1625,100 v1(1625,69.14) ; v1(3370,750) 3371.54,751.54 U3.2@3371.54,833.07
  L4 w4: v1(1605,3470) 1633,3442 1748.25,3442 1783.25,3407 1880,3407 2602,3407 2623,3428 2623,3539.82 2700.18,3617 2977.2,3617 3086.2,3508 3383.07,3508 3399.99,3491.08 3482.61,3491.08 3657.14,3316.54 3657.14,2222.87 3687,2193.01 3687,2088.14 3667,2068.14 3667,1733.29 3690.86,1709.44 3690.86,1563.98 3669.14,1542.26 3669.14,1435 3651.14,1417 3651.14,961.69 3541.45,852 3392,852 3370,830 v1(3370,750) 3370,710 3295,635 3070,635 3010,575 3010,365 2775,130 2565,130 2505,70 1625.86,70 v1(1625,69.14)
VCTB_TX: J2.12 J5.2 U3.3 | length 8701.7
  L1 w4: J5.2@515,3480 515,3425 575,3365 1105,3365 1200,3460 1563.99,3460 1571.62,3467.64 1572.64,3467.64 v1(1573.79,3468.79) ; J2.12@1585.39,164.84 1585.39,111.41 1595,101.8 v1(1595,100) ; v1(3350,775) 3351.85,776.85 U3.3@3351.85,833.07
  L4 w4: v1(1573.79,3468.79) 1576.21,3468.79 1611,3434 1744.94,3434 1779.94,3399 1885,3399 2598.49,3399 2609.8,3399 2631,3420.2 2631,3536.51 2703.49,3609 2973.88,3609 3082.88,3500 3330,3500 3348,3482 3480.37,3482 3649.14,3313.23 3649.14,2219.56 3679,2189.7 3679,2091.46 3659,2071.46 3659,1729.98 3682.86,1706.12 3682.86,1567.29 3661.14,1545.58 3661.14,1438.31 3643.14,1420.31 3643.14,965 3538.14,860 3370,860 3350,840 v1(3350,775) 3350,715 3295,660 3060,660 2985,585 2985,370 2755,140 2546.31,140 2494.6,88.28 1606.72,88.28 v1(1595,100)
VOUT1: J1.44 R11.1 U12.6 U12.7 | length 4950.5
  L1 w4: v1(1900,3485) 1900.18,3484.82 1900.18,3420.93 J1.44@1900.35,3420.75 ; v1(1900,3830) 1900,3827.34 1902.34,3825 R11.1@3141.3,3825 3141.3,3836.3 3157,3852 3558,3852 3645,3765 3645,3575 3660,3560 3807.94,3560 3835.08,3532.86 3854.82,3532.86 3890,3497.68 3890,3359.75 3867,3336.75 3867,1647 3785,1565 3695,1565 3670,1540 3670,1475.91 3695,1450.91 U12.7@3695,1430.24 U12.6@3745,1430.24
  L4 w4: v1(1900,3485) v1(1900,3830)
VOUT2: J1.46 R10.2 R25.2 U11.1 | length 3421.2
  L1 w4: J1.46@1920.04,3420.75 1920.04,3461.33 1925,3466.29 v1(1925,3480) ; v1(1925,3800) 3087.5,3800 v1(3088.75,3801.25) 3115,3775 R10.2@3142.6,3775 ; v1(3365,3800) 3595,3800 3636,3759 3636,3571.63 3657.63,3550 3806.63,3550 3831.77,3524.86 3851.51,3524.86 3882,3494.37 3882,3363.06 3770,3251.06 U11.1@3770,3195.24 3770,3125 3700,3055 3700,2935 3715,2920 3800,2920 3813.55,2906.45 3813.55,2890.15 R25.2@3813.7,2890
  L4 w4: v1(1925,3480) 1925,3483.71 1920,3488.71 1920,3791.29 1925,3796.29 v1(1925,3800) ; v1(3088.75,3801.25) 3090,3800 v1(3365,3800)
VOUT3: J1.48 R9.2 R24.2 U10.6 | length 4714
  L1 w4: J1.48@1939.72,3420.75 1940,3421.02 1940,3465 1985,3510 2455,3510 2480,3485 2530,3485 2560,3515 2560,3690 2645,3775 3069.57,3775 3094.57,3750 v1(3095,3750) 3095,3746.29 3100,3741.29 3100,3685 3110,3675 R9.2@3141.3,3675 ; U10.6@3750,2186.22 3750,2095 3675,2020 3675,1913.7 3663.08,1901.78 3663.08,1900.8 3652.28,1890 R24.2@3651.3,1890 3575,1890 3540,1925 3540,2429.28 3539,2430.28 3539,3239 3635.22,3335.22 3653.91,3335.22 3685.69,3367 3822,3367 3850,3395 3850,3446.82 3835,3461.82 v1(3835,3485)
  L4 w4: v1(3095,3750) 3489.69,3750 3658.69,3581 3807.69,3581 3820.5,3568.19 3820.5,3563.5 3820,3563 3820,3519.75 3835,3504.75 v1(3835,3485)
VOUT4: J1.65 R8.2 U9.7 | length 1923.8
  L1 w4: v1@2115,3650 2117.5,3647.5 v1(2117.5,3645) 2117.19,3644.69 2117.19,3566.72 J1.65@2116.89,3566.42 ; U9.7@3477.2,3568.5 3477.2,3617.63 3509.58,3650 3575.6,3650 3584.15,3658.55 3584.15,3669.15 R8.2@3590,3675 3590,3695 3578.18,3706.82 v1(3576.82,3706.82)
  L4 w4: v1(2117.5,3645) 2117.5,3715.13 2208.37,3806 2471.63,3806 2500.63,3777 3048,3777 3055,3770 3514.95,3770 3576.82,3708.13 v1(3576.82,3706.82)
W: J2.49 J3.50 | length 139
  L1 w11.55: J2.49@1959.41,310.51 1959.41,379.41 1959.46,379.46 v1(1959.46,380)
  L4 w11.55: J3.50@1959.41,310.51 v1@1959.44,379.97
X: J2.51 J3.52 | length 189.7
  L1 w11.55: J2.51@1979.09,310.51 1979.09,404.09 v1(1980,405)
  L4 w11.55: J3.52@1979.09,310.51 1979.2,310.62 1979.2,404.2 v1(1980,405)
X1: J2.57 J2.59 J2.61 J3.58 J3.60 J3.62 K1.1 | length 78.7
  L1 w4: J2.57@2038.15,310.51 J2.59@2057.83,310.51 J2.61@2077.52,310.51
  L4 w4: J3.58@2038.15,310.51 J3.60@2057.83,310.51 J3.62@2077.52,310.51
  other v1: 2045,245 2070,245 2060,265 2060,370 2045,390 2070,390
X2: J2.63 J3.64 K2.1 | length 885
  L1 w4: v1(2095,400) v1@2097.2,397.8
  L1 w10: K2.1@1830,810 1770,750 1770,550 1820,500 2050,500 2095,455 v1(2095,400) ; J2.63@2097.2,310.51 v1@2097.2,397.8
  L4 w4: v1(2095,400) v1@2096.1,398.9 ; J3.64@2096.1,311.61 J3.64@2097.2,310.51
  L4 w10: J3.64@2096.1,311.61 v1@2096.1,398.9
X3: J2.65 J3.66 | length 135.2
  L1 w10: J2.65@2116.89,310.51 v1(2116.89,378.11)
  L4 w10: J3.66@2116.89,310.51 v1(2116.89,378.11)
X4: J2.75 J3.76 K7.1 | length 2509.1
  L1 w4: v1(2215,400) v1@2215.32,399.69
  L1 w10: J2.75@2215.32,310.51 v1@2215.32,399.69
  L3 w10: K7.1@580,675 655,600 655,120 705,70 1375,70 1465,160 2020,160 2215,355 v1(2215,400)
  L4 w4: v1(2215,400) v1@2215.16,399.84 ; J3.76@2215.16,310.67 J3.76@2215.32,310.51
  L4 w10: J3.76@2215.16,310.67 v1@2215.16,399.84
X5: J2.77 J3.78 K5.1 | length 2361.5
  L1 w10: J2.77@2235,310.51 v1(2235,375)
  L3 w10: K5.1@580,480 610,450 610,120 685,45 1395,45 1485,135 2110,135 2235,260 v1(2235,375)
  L4 w10: J3.78@2235,310.51 v1(2235,375)
X6: J2.79 J3.80 | length 179.2
  L1 w4: v1@2254.69,399.69 v1(2255,400)
  L1 w10: J2.79@2254.69,310.51 v1@2254.69,399.69
  L4 w4: J3.80@2254.69,310.51 J3.80@2254.84,310.67 ; v1@2254.84,399.84 v1(2255,400)
  L4 w10: J3.80@2254.84,310.67 v1@2254.84,399.84
X7: J2.81 J3.82 | length 129
  L1 w10: J2.81@2274.37,310.51 v1(2274.37,375)
  L4 w10: J3.82@2274.37,310.51 v1(2274.37,375)
X8: J2.83 J3.84 | length 179.8
  L1 w4: v1@2294.06,399.06 v1(2295,400)
  L1 w10: J2.83@2294.06,310.51 v1@2294.06,399.06
  L4 w4: J3.84@2294.06,310.51 J3.84@2294.53,310.98 ; v1@2294.53,399.53 v1(2295,400)
  L4 w10: J3.84@2294.53,310.98 v1@2294.53,399.53
Y: J2.53 J3.54 | length 139
  L1 w11.55: J2.53@1998.78,310.51 1998.78,379.95 v1(1998.83,380)
  L4 w11.55: J3.54@1998.78,310.51 v1(1998.83,380)
Z: J2.55 J3.56 | length 180.2
  L1 w11.55: J2.55@2018.46,310.51 2018.46,398.46 v1(2020,400)
  L4 w11.55: J3.56@2018.46,310.51 2018.46,396.8 2020,398.33 v1(2020,400)
pads on no net: FD1.0 FD2.0 FD3.0 J1. J1.13 J1.15 J1.17 J1.18 J1.19 J1.21 J1.23 J1.25 J1.28 J1.30 J1.32 J1.33 J1.35 J1.37 J1.39 J1.41 J1.42 J1.43 J1.45 J1.50 J1.52 J1.74 J1.76 J1.78 J1.84 J1.86 J1.88 J1.90 J1.92 J1.94 J1.96 J1.98 J2. J2.16 J2.18 J2.20 J2.22 J2.24 J2.26 J2.28 J2.30 J2.32 J2.34 J2.36 J2.38 J2.40 J2.42 J2.44 J2.46 J2.48 J2.50 J2.52 J2.72 J2.74 J2.98 J3. J3.11 J3.13 J3.15 J3.17 J3.19 J3.21 J3.23 J3.25 J3.27 J3.29 J3.31 J3.33 J3.35 J3.37 J3.39 J3.41 J3.43 J3.45 J3.47 J3.49 J3.51 J3.53 J3.55 J3.57 J3.59 J3.61 J3.63 J3.65 J3.67 J3.69 J3.71 J3.73 J3.75 J3.77 J3.79 J3.81 J3.83 J3.85 J3.87 J3.89 J3.91 J3.93 J3.95 J3.96 J3.97 J3.98 J3.99 J3.100 U4.5 U4.6 U8.3 U10.1 U10.5 U10.8
copper on no net: | length 0.4
  L1 w4: 1644.45,3420.75 1644.72,3420.47

## Polygon pours and split planes (outlines as drawn)
GND on L1 "GND_L01_P005" (solid, pour order 5): 2305,415 2305,230 2400,230 2400,415
GND on L1 "GND_L01_P012" (solid, pour order 12): 3570,2725 3565,2720 3565,2240 3855,2240 3855,2710 3845,2720 3845,2725
GND on L1 "GND_L01_P013" (solid, pour order 13): 3665,805 3655,790 3655,415 3880,415 3890,425 3890,810
GND on L1 "GND_L01_P006" (solid, pour order 6): 1475,220 1475,75 1535,75 1535,220
GND on L1 "GND_L01_P004" (solid, pour order 4): 2150,415 2150,230 2205,230 2205,415
X1 on L1 "X1_L01_P003" (solid, pour order 3): 2030,415 2030,230 2085,230 2085,415
+5V on L1 "+5V_L01_P001" (solid, pour order 1): 1475,415 1535,415 1535,410 1535,230 1475,230
no net on L1 "NONET_L01_P000" (solid, pour order 0): 1475,415
X1 on L4 "X1_L04_P017" (solid, pour order 17): 2005,885 2005,369.04 2030,344.04 2085,344.04 2085,410 2130,455 2130,885
X1 on L4 "X1_L04_P009" (solid, pour order 9): 2030,415 2030,230 2085,230 2085,415
GND on L4 "GND_L04_P011" (solid, pour order 11): 2305,415 2400,415 2400,230 2305,230
GND on L4 "GND_L04_P010" (solid, pour order 10): 2150,415 2150,230 2205,230 2205,415
GND on L4 "GND_L04_P008" (solid, pour order 8): 1475,195 1475,75 1535,75 1535,195
+5V on L4 "+5V_L04_P007" (solid, pour order 7): 1475,415 1535,415 1535,230 1475,230
+5V on L3 "+5V_L03_P019" (solid, pour order 19): -30,3960 -20,3950 -20,-25 3940,-25 3945,-30 3945,3945
GND on L3 "GND_L03_P014" (solid, pour order 14): 1530,465 1530,230 2035,230 2035,465
GND on L2 (split plane): 3916.38,20.92 19.56,20.92 19.56,1018.52 3464.03,1018.52 3467.95,1018.91 3471.73,1020.05 3475.2,1021.91 3478.24,1024.41 3480.74,1027.45 3482.6,1030.93 3483.74,1034.7 3484.13,1038.62 3484.13,3243.34 3483.74,3247.26 3482.6,3251.03 3480.74,3254.51 3478.24,3257.55 3475.2,3260.05 3471.73,3261.91 3467.95,3263.05 3464.03,3263.44 19.56,3263.44 19.56,3917.73 3916.38,3917.73

## Keep-outs
Keep-Out Layer:
  the board outline again, w4

## Other copper
L4:
  region net GPIO28: 3757.86,3364.82

## Silkscreen, mask and mechanical layers (free items; w line width, h text height)
Top Overlay:
  text "DEBUG" at 1304.61,3870.43 h60 r180
  text "PROGRAMMER" at 2635,3870 h60 r180
  text "b" at 1365,3806.9 h393.7 r180
  text "POWER" at 2495,3725 h60 r180
  text "COMMAND" at 2130,3720 h60 r180
  text "e" at 1186.09,3716.09 h236.22 r180
  text "ALARM" at 1665,3715 h60 r180
  text "UNED" at 1290,3400 h98.43 r180
  text "ionosens" at 860,3385 h98.43 r180
  text "VCTB" at 585,1000 h78.74 r180
  text "R" at 2230,801.09 h472.44 r180
  text "W" at 2065,720 h236.22 r180
  text "VCTB" at 655,270 h98.43 r180
Mechanical 16:
  the board outline again, w0.5

## Text inside footprints (layer, text, board x,y; h text height)
J1: Mechanical 15 "1" at 1499.57,3658.15 h39.37 r180; Mechanical 15 "2" at 1499.57,3363.27 h39.37 r180
J2: Mechanical 15 "1" at 1499.57,402.24 h39.37 r180; Mechanical 15 "2" at 1499.57,107.36 h39.37 r180
J3: Mechanical 15 "1" at 1499.57,73.11 h39.37; Mechanical 15 "2" at 1499.57,367.99 h39.37
J4: Top Overlay "1" at 3061.65,3510 h50 r180; Top Overlay "5" at 2658.86,3510 h50 r180; Top Overlay "6" at 2658.86,3410 h50 r180; Top Overlay "2" at 3061.65,3410 h50 r180; Mechanical 13 "1" at 3061.65,3510 h50 r180; Mechanical 13 "2" at 3061.65,3410 h50 r180; Mechanical 13 "5" at 2658.86,3510 h50 r180; Mechanical 13 "6" at 2658.86,3410 h50 r180
J5: Top Overlay "6" at 996.14,3455 h50; Top Overlay "1" at 293.35,3455 h50; Mechanical 13 "6" at 996.14,3455 h50; Mechanical 13 "1" at 293.35,3455 h50